# Altium PCB PCB_FOR_ROBOT_NEW.PcbDoc
Units mil, origin at the board's own origin, x right, y up, seen from the top; angles counter-clockwise.
Board outline 2789.98 x 3094.83 mil, 2 copper layers (Top Layer, Bottom Layer); 11 components, 23 nets, 67 pads, 0 vias.
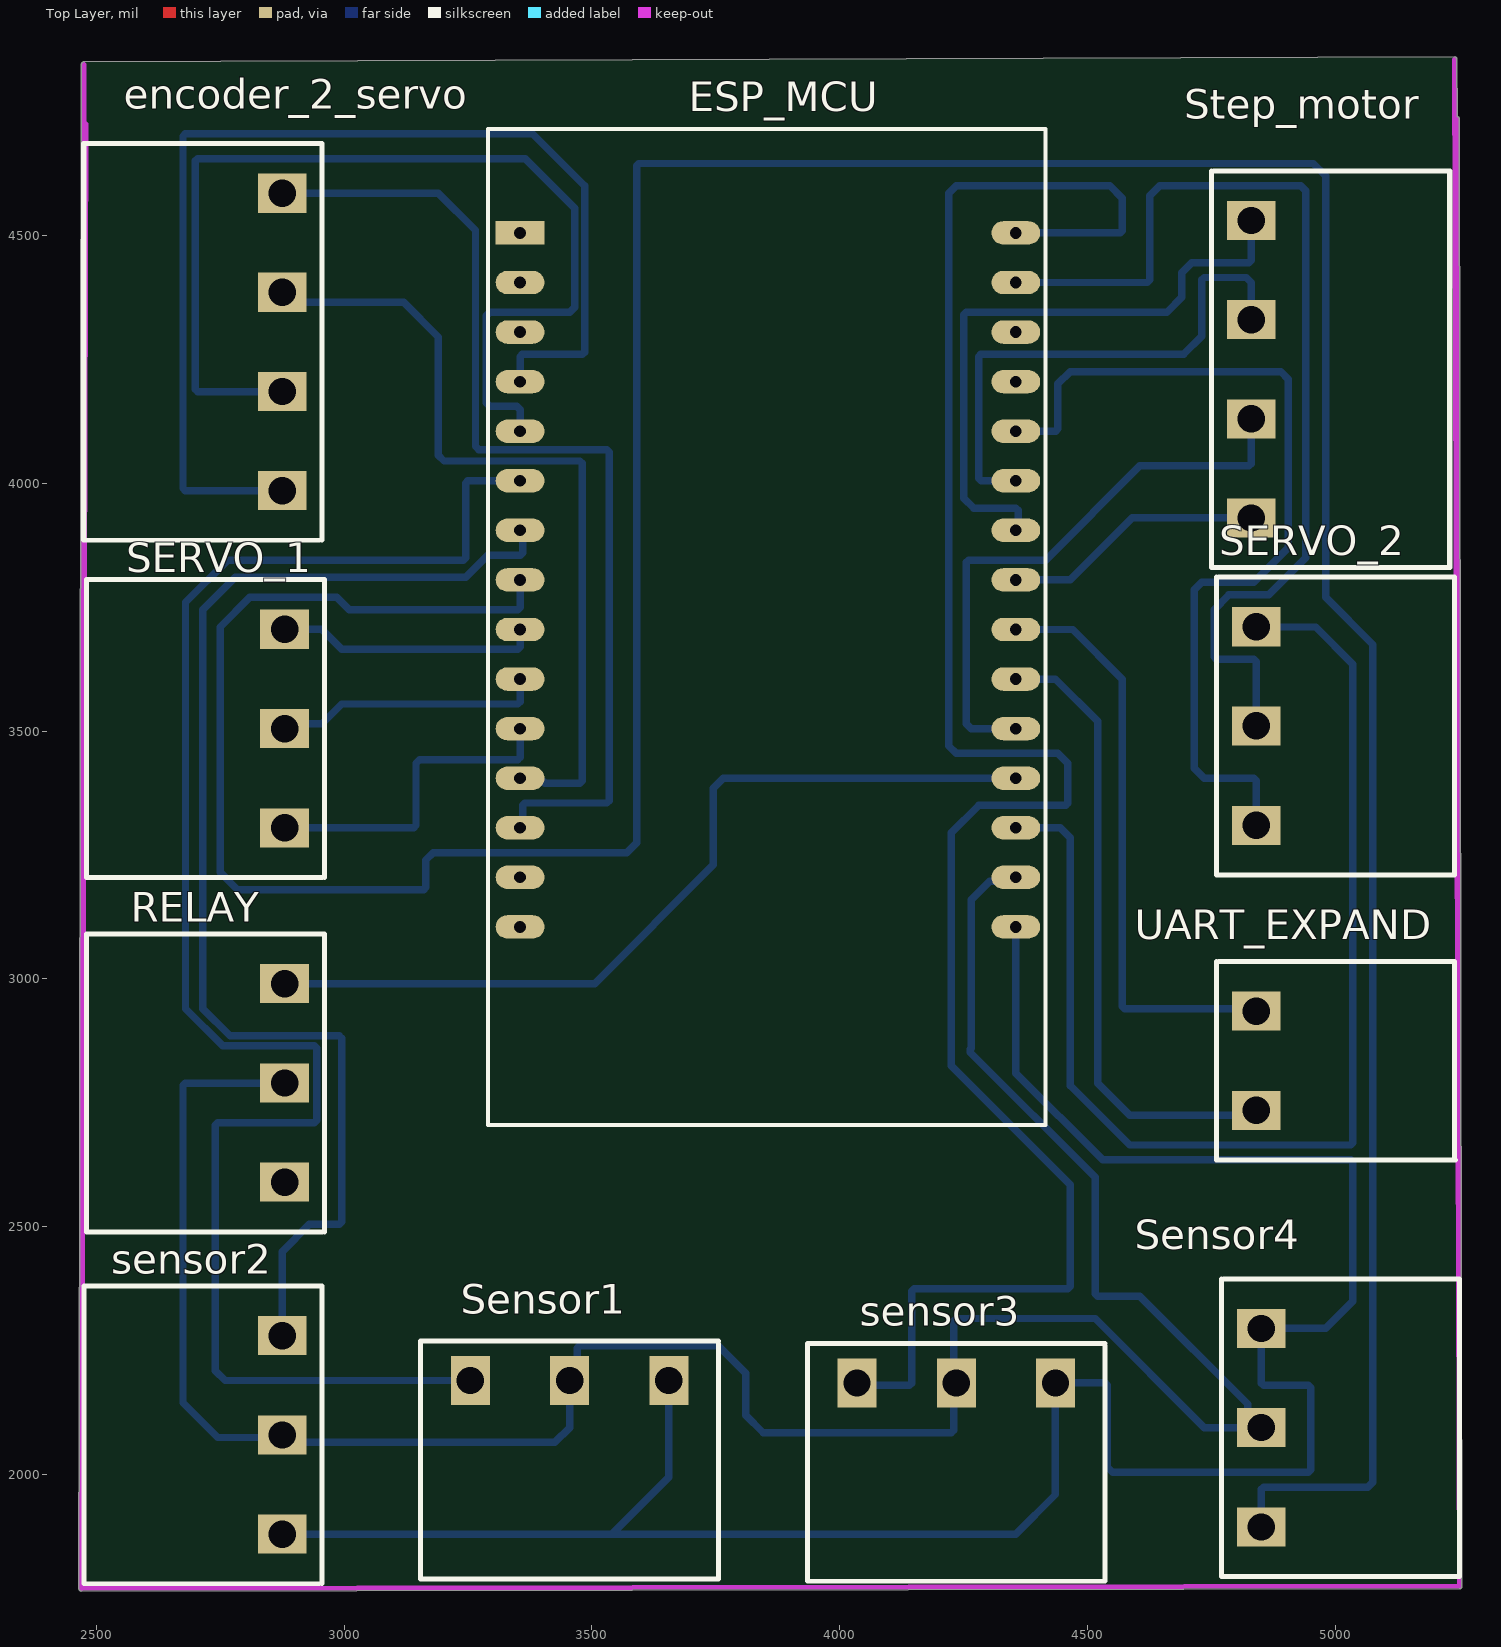
[diagram p0: Top Layer view]
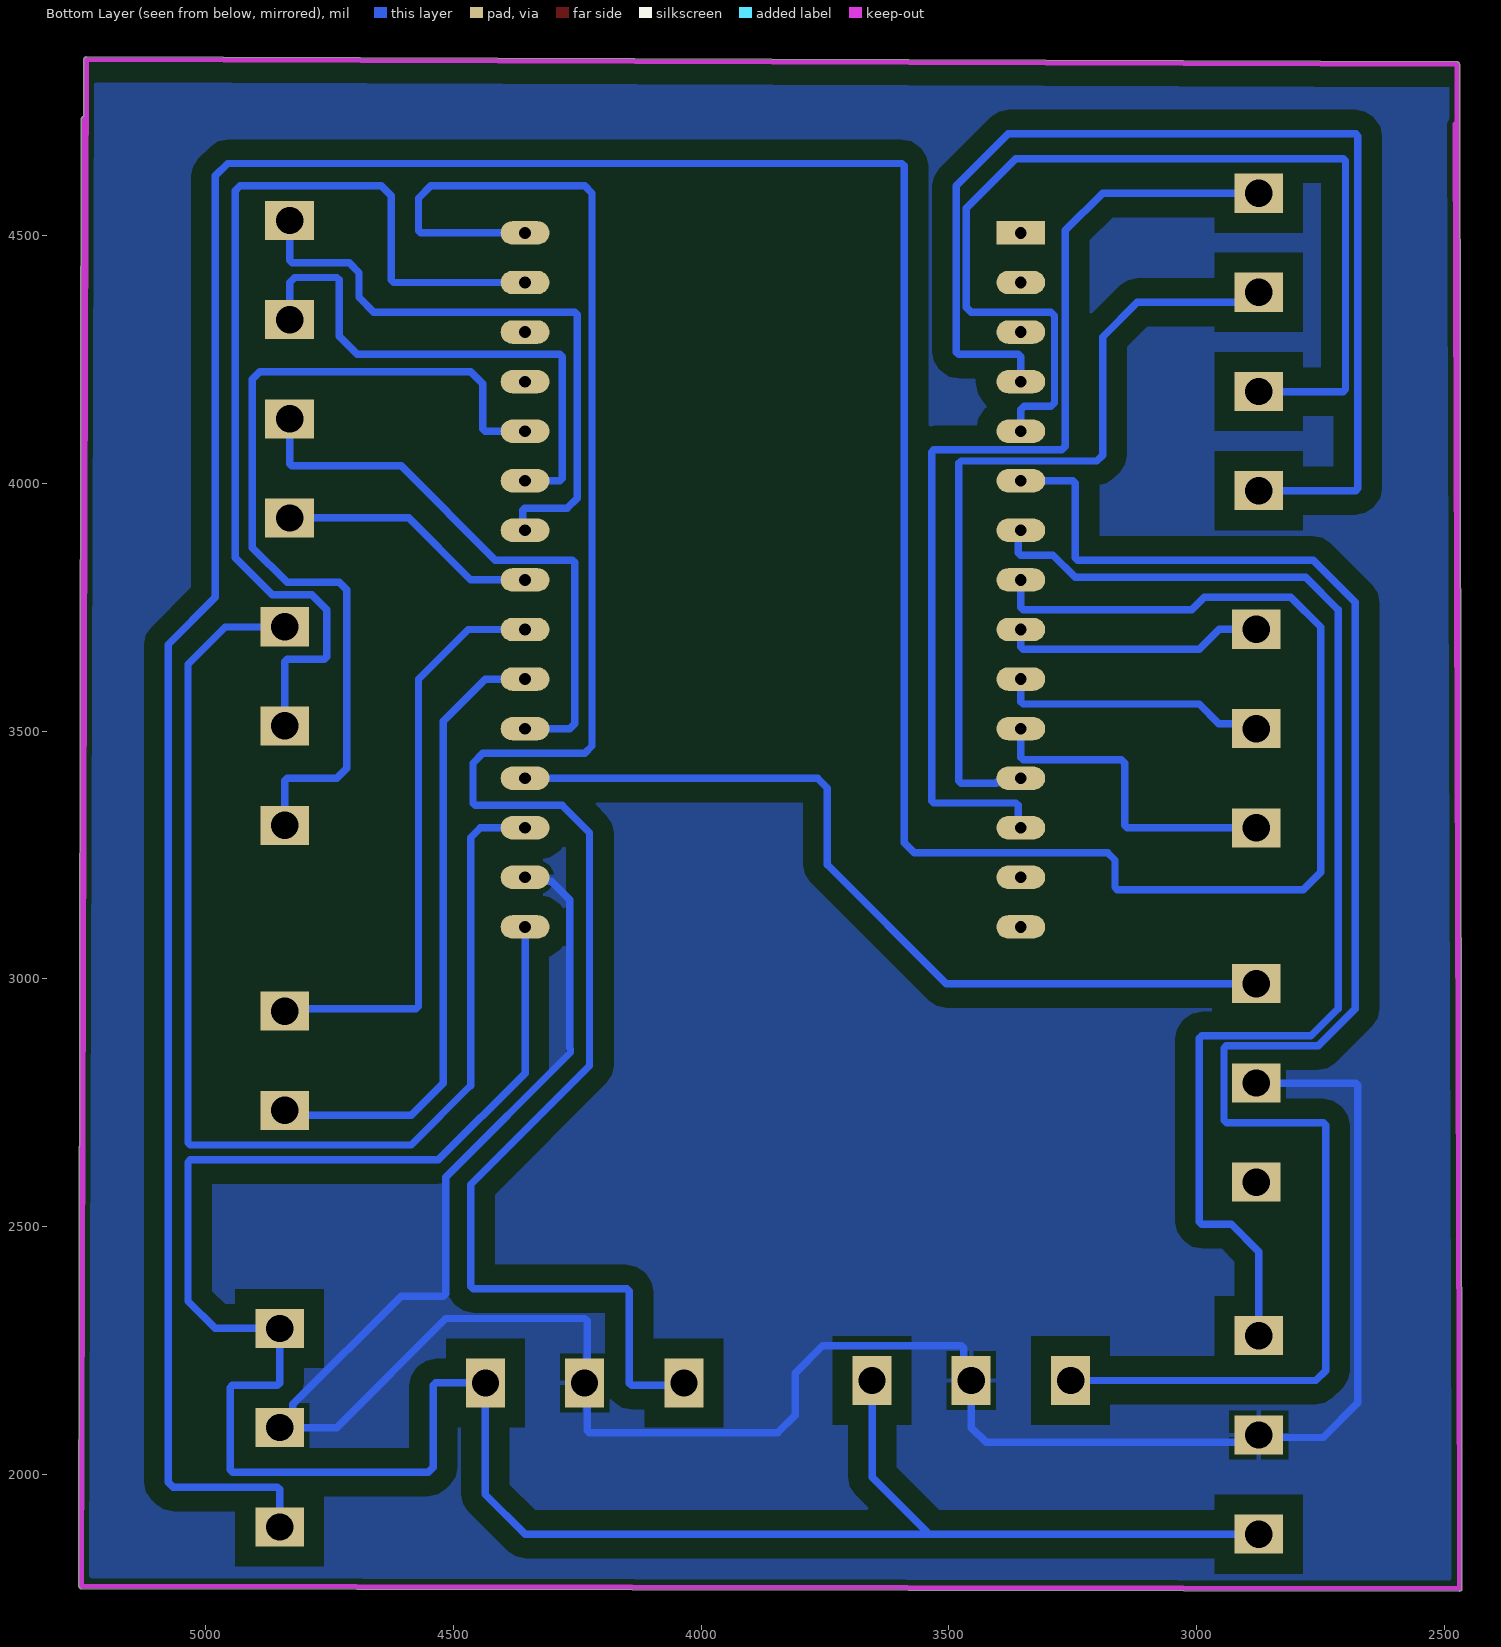
[diagram p1: Bottom Layer view, seen from below]

## Layer stack, top to bottom
Top Solder: solder mask 0.4, Solder Resist, Dk 3.5
Top Layer: signal copper 1.4
Dielectric 1: dielectric 12.6, FR-4, Dk 4.8
Bottom Layer: signal copper 1.4
Bottom Solder: solder mask 0.4, Solder Resist, Dk 3.5

## Board outline
2465.03,1770.2 2465.03,1904.29 2465.45,2026.43 2469.99,4845.01 cw(c2475,4845) 2474.98,4850.02 5239.98,4860.02 cw(c5240,4855) 5245.02,4855.02 5245.39,4739.52 cw(c5245.04,4734.51) 5250.06,4734.52 5255.02,1775.02 5255.02,1775 cw(c5250,1775) 5250.01,1769.98 2470.06,1765.18 cw(c2470.05,1770.2)

## Design rules (kind name [scope] priority, off if disabled: settings)
Clearance Clearance_1 [ExistsOnLayer('Bottom Layer') vs ExistsOnLayer('Bottom Layer')] p1: gap=40 ignorepadtopadclearanceinfootprint=FALSE
Clearance [All] p2: gap=40 ignorepadtopadclearanceinfootprint=FALSE
PolygonConnect [All] p1: connectstyle=Relief reliefconductorwidth=10 reliefentries=4 polygonreliefangle="90 Angle" airgapwidth=10
RoutingVias [All] p1: holewidth=28 width=50 viastyle="Through Hole" minholewidth=28 minwidth=50 maxholewidth=28 maxwidth=50
SilkToSilkClearance [IsText] p1: silktosilkclearance=10
SolderMaskExpansion [All] p1: expansion=4 istentingtop=FALSE
Width [All] p1: maxlimit=20 minlimit=8 preferedwidth=10 minimp=50.000000 maximp=50.000000 favimp=50.000000
29 further rules are at their usual default settings.

## Components (designator, comment, footprint, x,y, rotation, side; value= is the part's Value field where it differs from the comment)
encoder_2_servo "CON 4 EDG5.08" "CON 4 4EDG5.08" 2875,3985 r90 top
ESP_MCU "ESP32 DEVKIT" "ESP32 WROOM 32 KIT" 3355,4505 r0 top
RELAY "CON 3 EDG5.08" "CON 3 3EDG5.08" 2880,2590 r90 top
Sensor1 "CON 3 EDG5.08" "CON 3 3EDG5.08" 3655,2190 r180 top
sensor2 "CON 3 EDG5.08" "CON 3 3EDG5.08" 2875,1880 r90 top
sensor3 "CON 3 EDG5.08" "CON 3 3EDG5.08" 4435,2185 r180 top
Sensor4 "CON 3 EDG5.08" "CON 3 3EDG5.08" 4850,2295 r270 top
SERVO_1 "CON 3 EDG5.08" "CON 3 3EDG5.08" 2880,3305 r90 top
SERVO_2 "CON 3 EDG5.08" "CON 3 3EDG5.08" 4840,3710.5 r270 top
Step_motor "CON 4 EDG5.08" "CON 4 4EDG5.08" 4830,4530 r270 top
UART_EXPAND "CON 2 EDG5.08" "CON 2 2EDG5.08" 4840,2935 r270 top

## Footprints (in the part's own frame and the unit in brackets; to place one, negate y for a bottom-side part, rotate by r counter-clockwise, add the part's x,y. Pads: shape width x height; smd on the part's side, far side on the other; paste and mask are expansions set on the pad)
"CON 2 2EDG5.08" [mm]
  rect 2x2.5 hole 1.4: 1(0,0) 2(5.08,0)
  silkscreen extent -2.54,-2.03 7.62,10.21, body extent -2.5,-1.75 7.58,10.25, height 3.15
"CON 3 3EDG5.08" [mm]
  rect 2x2.5 hole 1.4: 1(0,0) 2(5.08,0) 3(10.173,0)
  silkscreen extent -2.54,-2.03 12.71,10.16, body extent -2.5,-1.75 12.67,10.25, height 3.15
"CON 4 4EDG5.08" [mm]
  rect 2x2.5 hole 1.4: 1(0,0) 1(0,0) 2(5.08,0) 2(5.08,0) 3(10.16,0) 3(10.173,0) 4(15.24,0)
  silkscreen extent -2.54,-2.03 17.78,10.17, body extent -2.5,-1.75 17.74,10.25, height 3.15
"ESP32 WROOM 32 KIT" [mm]
  rect 2.5x1.2 hole 0.6: 1(0,0)
  oval 2.5x1.2 hole 0.6: 2(0,-2.54) 3(0,-5.08) 4(0,-7.62) 5(0,-10.16) 6(0,-12.7) 7(0,-15.24) 8(0,-17.78) 9(0,-20.32) 10(0,-22.86) 11(0,-25.4) 12(0,-27.94) 13(0,-30.48) 14(0,-33.02) 15(0,-35.56) 16(25.4,-35.56) 17(25.4,-33.02) 18(25.4,-30.48) 19(25.4,-27.94) 20(25.4,-25.4) 21(25.4,-22.86) 22(25.4,-20.32) 23(25.4,-17.78) 24(25.4,-15.24) 25(25.4,-12.7) 26(25.4,-10.16) 27(25.4,-7.62) 28(25.4,-5.08) 29(25.4,-2.54) 30(25.4,0)
  silkscreen extent -1.65,-45.72 26.92,5.33, body extent -1.65,-45.6 26.85,5.33, height 10.49

## Part data
encoder_2_servo Sensor1 sensor2 sensor3 Sensor4 Step_motor: "C?m", Chung_Loai=C?m, Don_Vi=Con
  encoder_2_servo Step_motor: Ma_Hang=MH000979, Ten_Linh_Kien="CON 4 2EDG5.08-4P 5.08MM ( Xanh Cong)"
  Sensor1 sensor2 sensor3 Sensor4: Ma_Hang=MH000760, Ten_Linh_Kien="CON 3 2EDG5.08-3P 5.08MM ( Xanh Cong)"
ESP_MCU: library part "ESP32 WROOM 32 KIT"
RELAY SERVO_1 SERVO_2 UART_EXPAND: "Cắm", Chung_Loai=Cắm, Don_Vi=Con
  RELAY SERVO_1 SERVO_2: Ma_Hang=MH000760, Ten_Linh_Kien="CON 3 2EDG5.08-3P 5.08MM ( Xanh Cong)"
  UART_EXPAND: Ma_Hang=MH000759, Ten_Linh_Kien="CON 2 2EDG5.08-2P 5.08MM ( Xanh Cong)"

## Nets (pads, with @x,y where several pads share a name; then routed paths per layer and width w, separated by ;. In a path a pad name is that pad's centre, name@x,y a point inside that pad or via, vN(x,y) a via of type N, cw(c..) or ccw(c..) an arc to the next point about the centre after c; other vN are vias at no path point)
3.3V: ESP_MCU.16 Sensor1.1 sensor2.1 sensor3.1 Sensor4.1 | length 4788.3
  Top Layer w15: Sensor4.1 Sensor4.1@4855,2290
  Bottom Layer w15: sensor2.1 3540,1880 ; Sensor1.1 3655,1995 3540,1880 ; ESP_MCU.16 4355,2810 4530,2635 5030.31,2635 5035,2630.31 5035,2350 4980,2295 Sensor4.1 4850,2184.69 4854.69,2180 4945.31,2180 4950,2175.31 4950,2010 4945,2005 4550,2005 4540,2015 4540,2180.31 4535.31,2185 sensor3.1 4435,1960 4355,1880 3540,1880
Dir_step_base: ESP_MCU.25 Step_motor.2 | length 1084.3
  Bottom Layer w15: ESP_MCU.25 4285,4005 4280,4010 4280,4255.31 4284.69,4260 4693.37,4260 4730,4296.63 4730,4410.31 4734.69,4415 4820,4415 4830,4405 Step_motor.2@4830,4330
Dir_step_link_0: ESP_MCU.23 Step_motor.4 | length 526.8
  Bottom Layer w15: ESP_MCU.23 4465,3805 4590,3930 Step_motor.4
ENA_JOINT2: ESP_MCU.18 SERVO_2.1 | length 2431.5
  Bottom Layer w15: ESP_MCU.18 4445,3305 4465,3285 4465,2785 4585,2665 5030.31,2665 5035,2669.69 5035,3635 4960,3710 4840.5,3710 SERVO_2.1
ENA_JOINT_1: ESP_MCU.11 SERVO_1.1 | length 665.2
  Bottom Layer w15: SERVO_1.1 3140.31,3305 3145,3309.69 3145,3435.31 3152.31,3442.62 3350.31,3442.62 3355,3447.31 ESP_MCU.11
ENCODER_A_JOINT1: encoder_2_servo.3 ESP_MCU.12 | length 1659.4
  Bottom Layer w15: encoder_2_servo.3@2875,4385.5 2895.5,4365 3120,4365 3190,4295 3190,4056.37 3201.53,4044.84 3475.31,4044.84 3480,4040.16 3480,3399.69 3475.31,3395 3404.9,3395 3402.41,3397.49 3362.51,3397.49 ESP_MCU.12
ENCODer_A_JOINT2: encoder_2_servo.1 ESP_MCU.4 | length 2287.5
  Bottom Layer w15: encoder_2_servo.1@2875,3985 2679.69,3985 2675,3989.69 2675,4700.31 2679.69,4705 3380,4705 3485,4600 3485,4264.69 3480.31,4260 3359.69,4260 3355,4255.31 ESP_MCU.4
ENCODER_B_JOINT1: encoder_2_servo.4 ESP_MCU.13 | length 2060.8
  Bottom Layer w15: encoder_2_servo.4 3190,4585 3265,4510 3265,4074.38 3272.03,4067.35 3530.31,4067.35 3535,4062.67 3535,3359.69 3530.31,3355 3364.69,3355 3360,3350.31 3360,3310 ESP_MCU.13
ENCODER_B_JOINT2: encoder_2_servo.2 ESP_MCU.5 | length 2123.7
  Bottom Layer w15: encoder_2_servo.2@2875,4185 2704.69,4185 2700,4189.69 2700,4650.31 2704.69,4655 3365,4655 3465,4555 3465,4355 3455,4345 3294.03,4345 3287,4337.97 3287,4162.03 3294.03,4155 3347.97,4155 3355,4147.97 ESP_MCU.5
GND: ESP_MCU.17 RELAY.2 Sensor1.2 sensor2.2 sensor3.2 Sensor4.2 | length 5134.6
  Bottom Layer w15: RELAY.2 2679.69,2790 2675,2785.31 2675,2145 2745,2075 2870,2075 sensor2.2 2890,2065 3425,2065 3455,2095 Sensor1.2 3470,2205 3470,2255.31 3474.69,2260 3755,2260 3810,2205 3810,2120 3845,2085 4225.31,2085 4230,2089.69 4230,2180 sensor3.2 4230,2190 4230,2310.31 4234.69,2315 4515,2315 4735,2095 Sensor4.2 4823.32,2121.68 4823.32,2141.68 4605,2360 4520,2360 4515,2365 4515,2600 4263.31,2851.69 4263.31,2858.31 4265,2860 4265,3160 4302.52,3197.52 4347.52,3197.52 ESP_MCU.17
IN1_JOINT1: ESP_MCU.10 SERVO_1.2 | length 543.1
  Bottom Layer w15: SERVO_1.2 2890,3515 2955.31,3515 2995,3554.69 3350.31,3554.69 3355,3559.37 ESP_MCU.10
IN2_JOINT1: ESP_MCU.9 SERVO_1.3 | length 529
  Bottom Layer w15: SERVO_1.3 2954.5,3705.5 2995,3665 3350.31,3665 3355,3669.69 ESP_MCU.9
IN3_JOINT2: ESP_MCU.29 SERVO_2.2 | length 2052
  Bottom Layer w15: ESP_MCU.29 4620,4405 4625,4410 4625,4580 4645,4600 4930,4600 4940,4590 4940,3850 4865,3775 4785,3775 4755,3745 4755,3649.69 4759.69,3645 4835.31,3645 4840,3640.31 SERVO_2.2
IN4_JOINT2: ESP_MCU.26 SERVO_2.3 | length 1817
  Bottom Layer w15: ESP_MCU.26 4435.31,4105 4440,4109.69 4440,4200.31 4464.69,4225 4890,4225 4905,4210 4905,3870 4835,3800 4729.69,3800 4725,3795.31 4725,3795 4715,3785 4715,3425 4735,3405 4835.31,3405 4840,3400.31 SERVO_2.3 SERVO_2.3@4845,3315
Pulse_step_base: ESP_MCU.24 Step_motor.1 | length 1267.6
  Bottom Layer w15: ESP_MCU.24 4360,3910 4360,3945.31 4355.31,3950 4270,3950 4250,3970 4250,4340.31 4254.69,4345 4660,4345 4690,4375 4690,4425 4710,4445 4825,4445 4830,4450 Step_motor.1@4830,4530
pulse_step_link_0: ESP_MCU.20 Step_motor.3 | length 1177.4
  Bottom Layer w15: ESP_MCU.20 4265,3505 4255,3515 4255,3840.31 4259.69,3845 4415,3845 4605,4035 4825.31,4035 4830,4039.69 4830,4129.5 Step_motor.3@4830,4130
Relay_nam_cham: ESP_MCU.19 RELAY.3 | length 1737.5
  Bottom Layer w15: RELAY.3 3505.5,2990.5 3745,3230 3745,3385 3765,3405 ESP_MCU.19
RX: ESP_MCU.21 UART_EXPAND.2 | length 1281.3
  Bottom Layer w15: ESP_MCU.21 4435,3605 4520,3520 4520,2790 4585,2725 4830,2725 UART_EXPAND.2
sensor1: ESP_MCU.6 Sensor1.3 | length 3355.1
  Bottom Layer w15: Sensor1.3 2760,2190 2740,2210 2740,2705.31 2744.69,2710 2940,2710 2945,2715 2945,2860.31 2940.31,2865 2755,2865 2680,2940 2680,3760 2765,3845 3240.31,3845 3245,3849.69 3245,4000.31 3249.69,4005 ESP_MCU.6
sensor2: ESP_MCU.7 sensor2.3 | length 2534.5
  Bottom Layer w15: sensor2.3 2875,2450 2930,2505 2990.31,2505 2995,2509.69 2995,2880.31 2990.31,2885 2770,2885 2715,2940 2715,3745 2780,3810 3245,3810 3290,3855 3355.31,3855 3360,3859.69 3360,3900 ESP_MCU.7
sensor3: ESP_MCU.30 sensor3.3 | length 3996.7
  Bottom Layer w15: sensor3.3 4039.5,2180 4140.31,2180 4145,2184.69 4145,2370 4150,2375 4460,2375 4465,2380 4465,2585 4225,2825 4225,3295 4280,3350 4455.31,3350 4460,3354.69 4460,3435 4440,3455 4235,3455 4220,3470 4220,4585 4235,4600 4545,4600 4570,4575 4570,4509.69 4565.31,4505 ESP_MCU.30
sensor4: ESP_MCU.8 Sensor4.3 | length 7867.6
  Bottom Layer w15: ESP_MCU.8 3355,3749.69 3350.31,3745 3010,3745 2985,3770 2810,3770 2750,3710 2750,3215 2785,3180 3160.31,3180 3165,3184.69 3165,3240 3180,3255 3570,3255 3590,3275 3590,4640.31 3594.69,4645 4955,4645 4980,4620 4980,3769.69 5075,3674.69 5075,1985 5065,1975 4854.69,1975 4850,1970.31 Sensor4.3
TX: ESP_MCU.22 UART_EXPAND.1 | length 1190.6
  Bottom Layer w15: ESP_MCU.22 4470,3705 4570,3605 4570,2945 4575,2940 4835,2940 UART_EXPAND.1
pads on no net: ESP_MCU.1 ESP_MCU.2 ESP_MCU.3 ESP_MCU.14 ESP_MCU.15 ESP_MCU.27 ESP_MCU.28 RELAY.1

## Polygon pours and split planes (outlines as drawn)
GND on Bottom Layer "GND_L02_P000" (solid, remove dead copper, pour order 0): 5263.1,1775 5253.1,1785 5253.1,4855 2498.1,4855 2478.1,4835 2478.1,1770

## Keep-outs
Bottom Layer:
  lines w10: 2475,4845 5240,4855
Keep-Out Layer:
  lines w10: 2475,4845 2470.05,1770.2 ; 2479.58,4724.91 2470.05,1904.27 2470.05,1770.2 ; 5240,4855 5250,1775 ; 5245.04,4734.51 5250,1775 ; 2470.05,1770.2 5250,1775 ; 2470.05,1770.2 5250,1775